# Altium PCB PCA_0006_Mini_CB_REV_B.PcbDoc
Units mm, origin at the board's own origin, x right, y up, seen from the top; angles counter-clockwise.
Board outline 38.5 x 38.5 mm, 2 copper layers (Top, Bottom), stack 1.57 mm thick; 27 components, 89 nets, 219 pads, 98 vias.
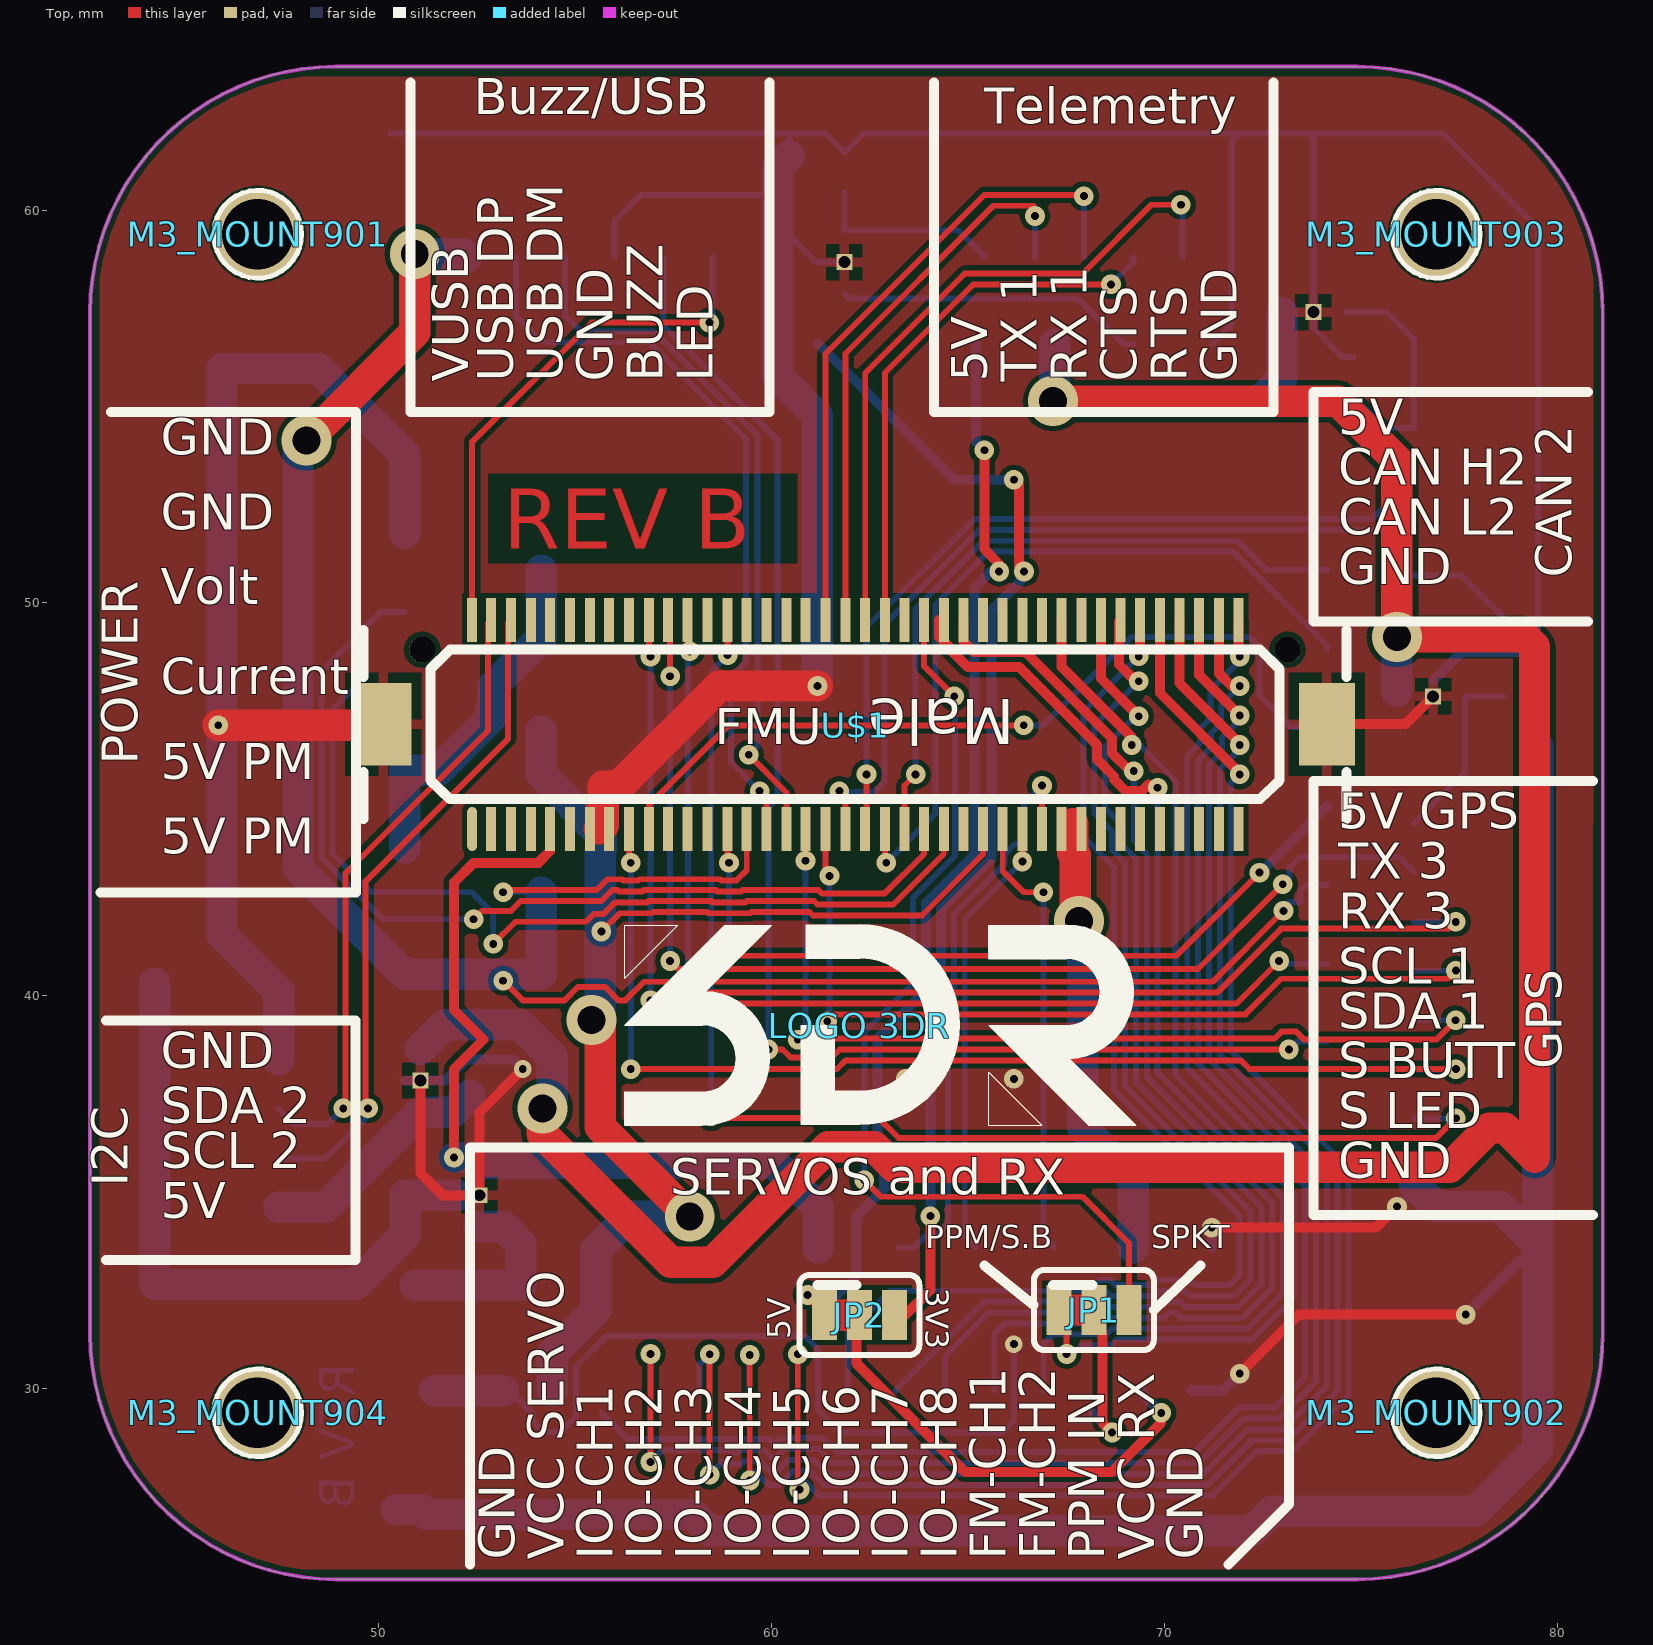
[diagram p0: Top view]
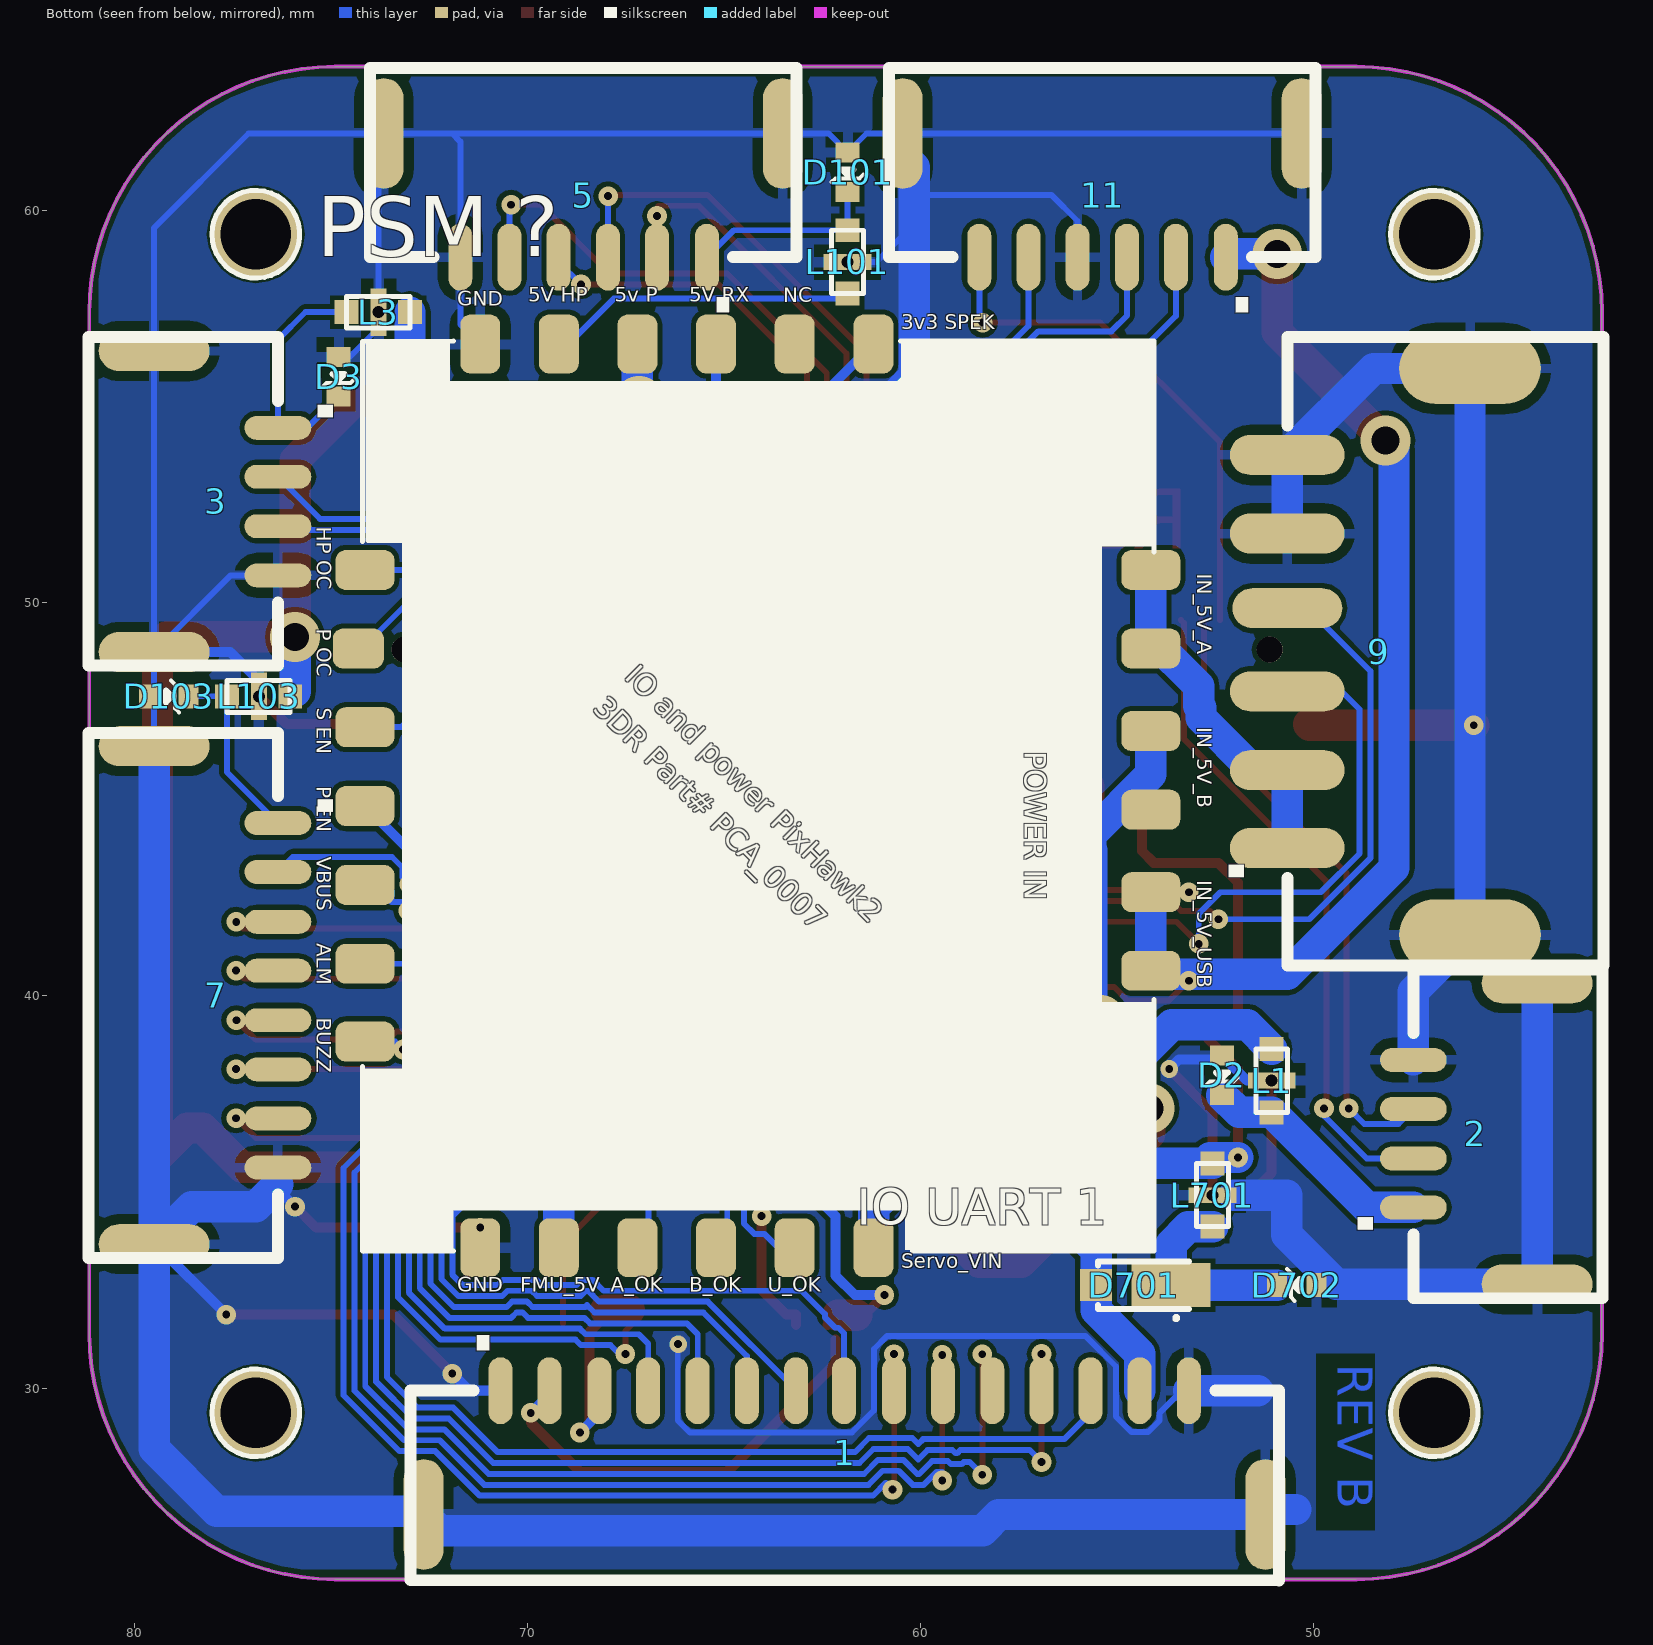
[diagram p1: Bottom view, seen from below]
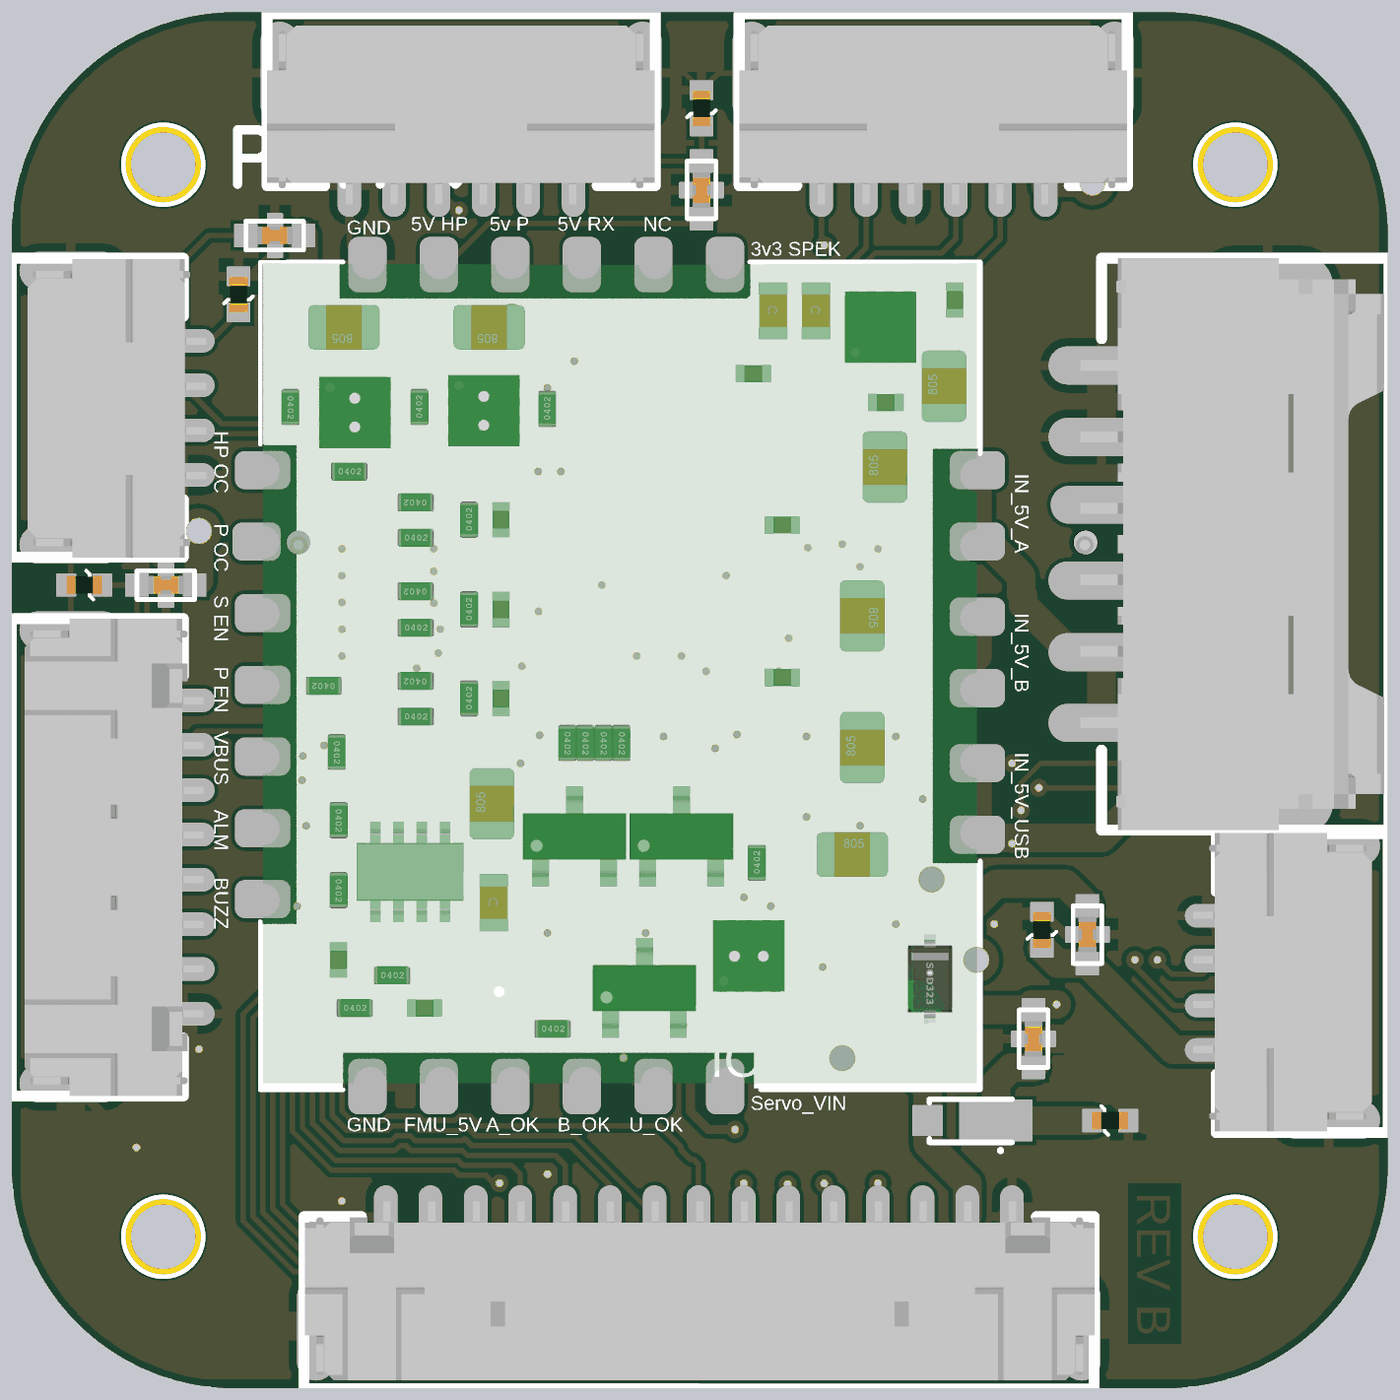
[diagram p2: 3D render of the assembled board from below, using the file's embedded part models]

## Layer stack, top to bottom
Top Solder: solder mask 0.0102, Solder Resist, Dk 3.5
Top: signal copper 0.035
Dielectric 1: core 1.5, FR-4, Dk 4.8
Bottom: signal copper 0.035
Bottom Solder: solder mask 0.0102, Solder Resist, Dk 3.5

## Board outline
42.65,31.4 ccw(c48.9,31.4) 48.9,25.15 74.9,25.15 ccw(c74.9,31.4) 81.15,31.4 81.15,57.4 ccw(c74.9,57.4) 74.9,63.65 48.9,63.65 ccw(c48.9,57.4) 42.65,57.4

## Design rules (kind name [scope] priority, off if disabled: settings)
Clearance jumpers [(InNet('RX_5V0_OUT') OR InNet('PPM-SBUS-PROT')) vs (InNet('Net1_2') OR InNet('Net1_3'))] p1: gap=0
Clearance mdViaVia [IsVia vs IsVia] p2: gap=0.127
Clearance mdPadVia [IsPad vs IsVia] p3: gap=0.127
Clearance mdPadPad [IsPad vs IsPad] p4: gap=0.127
Clearance mdWireVia [(InLayerClass('Signal Layers') AND IsTrack) vs IsVia] p5: gap=0.127
Clearance mdWirePad [(InLayerClass('Signal Layers') AND IsTrack) vs IsPad] p6: gap=0.127
Clearance mdWireWire [(InLayerClass('Signal Layers') AND IsTrack) vs (InLayerClass('Signal Layers') AND IsTrack)] p7: gap=0.127
Clearance [All] p8: gap=0.127
ComponentClearance [All] p1: gap=0.076 collisioncheckmode=3 verticalgap=0 showdistances=FALSE
HoleSize [All] p1: absolutevalues=TRUE maxlimit=2540 minlimit=0.2 maxpercent=80.000 minpercent=20.000
HoleToHoleClearance [All] p1: gap=0.203 allowstackedmicrovias=TRUE
MinimumSolderMaskSliver [All] p1 off: minsoldermaskwidth=0.254
PasteMaskExpansion [All] p1: expansion=0.025
PolygonConnect ThermalVias [IsVia] p1: connectstyle=Direct reliefconductorwidth=0.254 reliefentries=4 polygonreliefangle="90 Angle" airgapwidth=0.254
PolygonConnect [All] p2: connectstyle=Relief reliefconductorwidth=0.254 reliefentries=4 polygonreliefangle="90 Angle" airgapwidth=0.254
RoutingVias [All] p1: holewidth=0.2 width=0.5 viastyle="Through Hole" minholewidth=0.2 minwidth=0.5 maxholewidth=0.711 maxwidth=1.27
ShortCircuit JP [(InNet('RX_5V0_OUT') OR InNet('PPM-SBUS-PROT')) vs (InNet('Net1_2') OR InNet('Net1_3'))] p1: allowed=TRUE
ShortCircuit [All] p2: allowed=FALSE
SilkToBoardRegionClearance [All] p1 off:
SilkToSilkClearance [All] p1 off: silktosilkclearance=0.254
SilkToSolderMaskClearance [IsPad] p1 off: minsilkscreentomaskgap=0.254 clearancetoexposedcopper=TRUE
SolderMaskExpansion [All] p1: expansion=0.025
UnpouredPolygon [All] p1: allowunpoured=FALSE
Width [All] p1: maxlimit=0.8 minlimit=0.15 preferedwidth=0.254
20 further rules are at their usual default settings.

## Classes and differential pairs
component class PCA_0006_Mini_CB_Plugs_REV_A: 2 3 5 7 D2 D3 D101 D103 L1 L3 L101 L103
component class PCA_0006_Mini_CB_Power_REV_A: 9 11 "PSM ?"
component class PCA_0006_Mini_CB_Servo_REV_A: 1 D701 D702 JP1 JP2 L701
component class PCA_0006_Mini_CB_Mech_REV_A: "LOGO 3DR" M3_MOUNT901 M3_MOUNT902 M3_MOUNT903 M3_MOUNT904
component class PCA_0006_Mini_CB_80Pin_REV_A: FIDUCIALS1 U$1

## Components (designator, comment, footprint, x,y, rotation, side; value= is the part's Value field where it differs from the comment)
1 "CLICKMATE_1.25_15" CLICKMATE_H15 61.914,24.5 r0 bottom
2 "CLICKMATE_1.25_4" CLICKMATE_H4 42,36.495 r270 bottom
3 "CLICKMATE_1.25_4" CLICKMATE_H4 81.8,52.578 r90 bottom
5 "CLICKMATE_1.25_6" CLICKMATE_H6 68.58,64.25 r180 bottom
7 "CLICKMATE_1.25_8" CLICKMATE_H8 81.8,40.005 r90 bottom
9 "CLICKMATE_2_6" CLICKMATE_H6_2MM 43.757,48.768 r270 bottom
11 "CLICKMATE_1.25_6" CLICKMATE_H6 55.372,64.25 r180 bottom
D2 "DIODE-TVS" 0402-TVS 52.324,37.973 r90 bottom
D3 "DIODE-TVS" 0402-TVS 74.803,55.753 r90 bottom
D101 "DIODE-TVS" 0402-TVS 61.849,60.96 r90 bottom
D103 "DIODE-TVS" 0402-TVS 79.121,47.625 r0 bottom
D701 "Schottky barrier diode in DO214AC, e.g. Fairchild SS14." MICROSMP 54.864,32.639 r0 bottom
D702 "DIODE-TVS" 0402-TVS 50.419,32.639 r180 bottom
JP1 "JUMPER-31-2" SJ_3_PASTE1&2 68.199,32.004 r0 top
JP2 "JUMPER-31-2" SJ_3_PASTE1&2 62.23,31.877 r0 top
L1 "Kyocera KNH16C104DA5TS EMI filter" KYOCERA-KNH16-DA 51.054,37.846 r270 bottom
L3 "Kyocera KNH16C104DA5TS EMI filter" KYOCERA-KNH16-DA 73.787,57.404 r0 bottom
L101 "Kyocera KNH16C104DA5TS EMI filter" KYOCERA-KNH16-DA 61.849,58.674 r90 bottom
L103 "Kyocera KNH16C104DA5TS EMI filter" KYOCERA-KNH16-DA 76.835,47.625 r0 bottom
L701 "Kyocera KNH16C104DA5TS EMI filter" KYOCERA-KNH16-DA 52.559,34.925 r90 bottom
"LOGO 3DR" "DO NOT FIT" 3DR_SMALL 62.23,39.243 r0 top
M3_MOUNT901 "MOUNT-HOLE1.8MM" MOUNT-HOLE1.8 46.914,59.385 r0 top
M3_MOUNT902 "MOUNT-HOLE1.8MM" MOUNT-HOLE1.8 76.911,29.388 r0 top
M3_MOUNT903 "MOUNT-HOLE1.8MM" MOUNT-HOLE1.8 76.911,59.385 r0 top
M3_MOUNT904 "MOUNT-HOLE1.8MM" MOUNT-HOLE1.8 46.914,29.388 r0 top
"PSM ?" "Power Selection module" PSM 63.881,45.339 r270 bottom
U$1 "CON-DF17-80M" CON-DF17-80M 62.128,46.914 r180 top locked

## Footprints (in the part's own frame and the unit in brackets; to place one, negate y for a bottom-side part, rotate by r counter-clockwise, add the part's x,y. Pads: shape width x height; smd on the part's side, far side on the other; paste and mask are expansions set on the pad)
3DR_SMALL [mm]
  silkscreen extent -5.97,-2.53 7.04,2.57
0402-TVS [mil] "0402-TVS"
  rect 20x24 smd: A(20,0) C(-19.68,0)
  silkscreen extent -10,-16 3,16, body extent -20,-10 20,10, height 20
CLICKMATE_H4 [mil] "5023860470"
  rrect100% 24x67 smd: 1(74,-214.57) 2(25,-214.57) 3(-24.61,-214.57) 4(-73.82,-214.57)
  rrect100% 40x111 smd: GND(-150.59,-90.55) GND(151,-90.55)
  silkscreen extent -164,-215 165,-25, body extent -165,-240 164,-43, height 217
CLICKMATE_H6 [mil]
  rrect100% 24x67 smd: 1(124,-214.57) 2(74,-214.57) 3(25,-214.57) 4(-24.61,-214.57) 5(-73.82,-214.57) 6(-123.03,-214.57)
  rrect100% 40x111 smd: GND(-199.8,-90.55) GND(200,-90.55)
  silkscreen extent -214,-215 214,-25, body extent -214,-235 214,-38, height 217
CLICKMATE_H6_2MM [mil]
  rrect100% 40x115 smd: 1(197,-271.65) 2(119,-271.65) 3(40,-271.65) 5(-118.11,-271.65) 6(-196.85,-271.65)
  rrect100% 40x110.24 smd: 4(-43.31,-271.65)
  rrect100% 71x142 smd: GND(-283.46,-88.58) GND(284,-88.58)
  silkscreen extent -315,-272 315,45, body extent -315,-295 315,40, height 270
CLICKMATE_H8 [mil]
  rrect100% 24x67 smd: 1(173,-214.57) 2(124,-214.57) 3(74,-214.57) 4(25,-214.57) 5(-24.61,-214.57) 6(-73.82,-214.57) 7(-123.03,-214.57) 8(-172.24,-214.57)
  rrect100% 40x111 smd: GND(-249.02,-90.55) GND(250,-90.55)
  silkscreen extent -263,-215 263,-25, body extent -263,-237 263,-40, height 217
CLICKMATE_H15 [mil]
  rrect100% 24x67 smd: 1(345.24,-214.57) 2(296.24,-214.57) 3(246.24,-214.57) 4(197.24,-214.57) 5(147.64,-214.57) 6(98.42,-214.57) 7(49.21,-214.57) 8(0.97,-214.57) 9(-49.03,-214.57) 10(-98.03,-214.57) 11(-147.64,-214.57) 12(-196.85,-214.57) 13(-246.06,-214.57) 14(-295.27,-214.57) 15(-344.49,-214.57)
  rrect100% 40x111 smd: GND(-421.26,-90.55) GND(422.24,-90.55)
  silkscreen extent -435,-215 435,-25, body extent -436,-231 434,-35, height 217
CON-DF17-80M [mil]
  rrect100% 10x44 smd: 1(384,105)
  rect 10x44 smd: 2(384,-104.33) 3(365,105) 4(365,-104.33) 5(345,105) 6(345,-104.33) 7(325,105) 8(325,-104.33) 9(306,105) 10(306,-104.33) 11(286,105) 12(286,-104.33) 13(266,105) 14(266,-104.33) 15(247,105) 16(247,-104.33) 17(227,105) 18(227,-104.33) 19(207,105) 20(207,-104.33) 21(188,105) 22(188,-104.33) 23(168,105) 24(168,-104.33) 25(148,105) 26(148,-104.33) 27(128,105) 28(128,-104.33) 29(109,105) 30(109,-104.33) 31(89,105) 32(89,-104.33) 33(69,105) 34(69,-104.33) 35(50,105) 36(50,-104.33) 37(30,105) 38(30,-104.33) 39(10,105) 40(10,-104.33) 41(-9.84,105) 42(-9.84,-104.33) 43(-29.53,105) 44(-29.53,-104.33) 45(-49.21,105) 46(-49.21,-104.33) 47(-68.9,105) 48(-68.9,-104.33) 49(-88.58,105) 50(-88.58,-104.33) 51(-108.27,105) 52(-108.27,-104.33) 53(-127.95,105) 54(-127.95,-104.33) 55(-147.64,105) 56(-147.64,-104.33) 57(-167.32,105) 58(-167.32,-104.33) 59(-187.01,105) 60(-187.01,-104.33) 61(-206.69,105) 62(-206.69,-104.33) 63(-226.38,105) 64(-226.38,-104.33) 65(-246.06,105) 66(-246.06,-104.33) 67(-265.75,105) 68(-265.75,-104.33) 69(-285.43,105) 70(-285.43,-104.33) 71(-305.12,105) 72(-305.12,-104.33) 73(-324.8,105) 74(-324.8,-104.33) 75(-344.49,105) 76(-344.49,-104.33) 77(-364.17,105) 78(-364.17,-104.33) 79(-383.86,105) 80(-383.86,-104.33)
  rect 56x83 smd: GND(-472.44,0) GND(473,0)
  round 26 hole 26 unplated: hole-1(-433.07,-74.8) hole-2(434,-74.8)
  silkscreen extent -492,-94 493,95, body extent -492,-109 492,115, height 124
KYOCERA-KNH16-DA [mil] "KYOCERA-KNH16-DA"
  rect 16x16 smd: GND(0,-15.75) GND(0,16)
  rect 16x16 hole 12: GND(0,0)
  rect 24x24 smd: P$1(-31.5,0) P$2(32,0)
  silkscreen extent -31,-16 32,16, body extent -20,-10 20,10, height 14
MICROSMP [mil]
  rect 32x32 smd: ANODE(26,0)
  rect 79x44 smd: CATHODE(-49.21,0)
  silkscreen extent -67,-24 24,35
MOUNT-HOLE1.8 [mil]
  round 87 hole 71: 1(0,0)
  silkscreen extent -44,-44 44,44
PSM [mm]
  rrect50% 1.5x1.016 smd: 5V_HIPOWER(-11.25,-5.318) 5V_PERIPH(-11.25,-3.317) !VBUS_VALID(11.75,0.686) !VDD_BACKUP_VALID(11.75,-1.318) !VDD_BRICK_VALID(11.75,-3.317) GND(-11.25,-7.318) GND(11.75,-7.318) NC(-11.25,0.686) RX(-11.25,-1.318) SERVO_IN(11.75,2.692) SPEK(-11.25,2.692) VDD_5V_IN_PROT(11.75,-5.318)
  rrect50% 1.016x1.5 smd: !VDD_5V_HIPOWER_OC(-5.5,-10.25) !VDD_5V_PERIPH_EN(0.508,-10.25) ALARM(4.521,-10.25) BUZZER_OUT(6.502,-10.25) VBUS(2.515,-10.25) VDD_3V3_SPEKTRUM_EN(-1.5,-10.25) VDD_5V_BACKUP(-1.4,9.75) VDD_5V_BACKUP(0.6,9.75) VDD_BRICK_IN(-5.5,9.75) VDD_BRICK_IN(-3.5,9.75) VDD_VBUS(2.7,9.75) VDD_VBUS(4.7,9.75)
  rrect50% 1.016x1.3 smd: !VDD_5V_PERIPH_OC(-3.5,-10.419)
  silkscreen extent -11.33,-10.32 11.9,9.83, body extent -11.3,-10.24 11.66,9.73, height 2.11
SJ_3_PASTE1&2 [mil]
  rect 25x50 smd paste-39.37: 1(-35,0) 2(0,0) 3(35,0)
  silkscreen extent -60,-40 60,40

## Part data
1: "Connector, Receptacle, 15Pos, 1.25MM, R/A, SMD, Tin"
2 3: "Connector, Receptacle, 4Pos, 1.25MM, R/A, SMD, Tin"
5 11: "1.25 W/B SGL R/A REC ASSY 6CKT"
7: "Connector, Receptacle, 8Pos, 1.25MM, R/A, SMD, Tin"
9: "Connector, Receptacle, 6Pos, 2.00MM, R/A, PCB, Tin"
D2 D3 D101 D103 D702: "Diode, TVS, 14VWM, 40VC, 0402, SMD"
D701: library part DIODE-SCHOTTKY_MSMP, "Diode, Schottky, 40V, 1A, MicroSMP, SMD"
JP1 JP2 M3_MOUNT901 M3_MOUNT902 M3_MOUNT903 M3_MOUNT904: "DO NOT FIT"
L1 L3 L101 L103 L701: library part KNH16C104DA5TS, "Capacitor, Filter, 0.1uF, 25V, 2A, 0603, SMD"
"LOGO 3DR": library part "3DR Logo"
"PSM ?": library part PSMPSM, "PCA, PSM, PX4, Assembly"
U$1: "Connector, Header, 80Pos, .5MM, DUAL, SMD, Au"

## Via types
v1: diameter 0.5, hole 0.2, Top to Bottom, tented both sides, 88 vias
v2: diameter 1.27, hole 0.711, Top to Bottom, tented both sides, 8 vias
v3: diameter 0.45, hole 0.2, Top to Bottom, tented both sides, 2 vias

## Nets (pads, with @x,y where several pads share a name; then routed paths per layer and width w, separated by ;. In a path a pad name is that pad's centre, name@x,y a point inside that pad or via, vN(x,y) a via of type N, cw(c..) or ccw(c..) an arc to the next point about the centre after c; other vN are vias at no path point)
ALARM: "PSM ?.ALARM" U$1.24 | length 26.8
  Top w0.15: U$1.24 57.861,48.819 v1(57.912,48.768) ; v1(57.912,39.624) 58.094,39.806 71.832,39.806 v1(72.913,40.886)
  Bottom w0.15: v1(57.912,39.624) 57.864,39.672 57.864,48.552 57.78,48.636 v1(57.912,48.768) ; v1(72.913,40.886) 72.981,40.818 74.131,40.818
AUX_BATT_CURRENT_SENS: U$1.25
AUX_BATT_VOLTAGE_SENS: U$1.23
BATT_CURRENT_SENS_PROT: 9.3 U$1.49 | length 24.3
  Top w0.15: v1(52.913,41.323) 53.476,41.886 55.273,41.886 55.475,42.089 55.723,42.089 56.015,42.38 56.829,42.38 56.862,42.413 58.463,42.413 58.496,42.38 59.329,42.38 59.362,42.413 61.077,42.413 61.166,42.324 63.089,42.324 64.378,43.613 U$1.49
  Bottom w0.15: 9.3 49.278,47.752 48.821,47.295 48.821,43.62 49.804,42.637 52.365,42.637 52.913,42.089 v1(52.913,41.323)
BATT_VOLTAGE_SENS_PROT: 9.4 U$1.47 | length 24.9
  Top w0.15: v1(52.413,41.95) 52.626,42.163 53.361,42.163 53.611,42.413 55.656,42.413 55.933,42.69 56.078,42.69 56.111,42.657 56.714,42.657 56.747,42.69 58.578,42.69 58.611,42.657 59.214,42.657 59.247,42.69 61.191,42.69 61.281,42.601 62.866,42.601 63.878,43.613 U$1.47
  Bottom w0.15: 9.4@50.657,49.768 50.044,49.768 48.544,48.268 48.544,43.505 50.099,41.95 v1(52.413,41.95)
BUZZER_OUT: 11.5 "PSM ?.BUZZER_OUT" | length 36
  Top w0.15: v1(59.912,38.636) 60.273,38.636 60.475,38.435 61.524,38.435 61.726,38.636 v1(73.163,38.636)
  Bottom w0.15: 11.5 57.247,57.052 60.142,54.157 60.142,45.025 59.912,44.795 v1(59.912,38.636) ; v1(73.163,38.636) 73.221,38.636 73.363,38.778 73.363,38.837 74.131,38.837
CAN_H_1: U$1.79
CAN_H_2: 3.2 U$1.41 | length 20.7
  Top w0.15: U$1.41 62.412,44.281 v1(62.412,45.637)
  Bottom w0.15: v1(62.412,45.637) 62.412,49.387 65.162,52.136 75.273,52.136 75.297,52.16 75.297,52.163 76.347,53.213 3.2
CAN_L_1: U$1.77
CAN_L_2: 3.3 U$1.39 | length 21.6
  Top w0.15: v1(61.722,45.212) v1@61.874,45.06 ; v1@61.874,45.06 U$1.39 v1@61.874,45.06
  Bottom w0.15: v1(61.722,45.212) 61.75,45.184 62.6,45.184 62.864,45.449 62.864,49.447 65.277,51.86 76.256,51.86 3.3
E\X\T\E\R\N\_\C\S\: U$1.5
EXTERN_DRDY: U$1.11
F\M\U\-\L\E\D\_\A\M\B\E\R\: 11.6 U$1.2 | length 13.5
  Top w0.152: U$1.2 52.375,54.099 55.412,57.136 v1(58.412,57.136)
  Bottom w0.152: v1(58.412,57.136) 58.497,57.221 11.6
FMU-!RESET: U$1.7
FMU-CH1-PROT: 1.4 U$1.50 | length 30.2
  Top w0.254: U$1.50 64.259,49.564 64.259,49.138 64.497,48.9 64.497,48.861 64.988,48.37 66.299,48.37 68.278,46.391 68.278,46.02 68.711,45.586 68.711,45.511 69.006,45.216 69.424,45.216 69.583,45.375 69.742,45.216 v1(69.822,45.296)
  Bottom w0.15: 1.4 66.924,31.148 67.162,31.387 68.521,31.387 68.663,31.529 72.1,31.529 73.017,32.445 73.017,34.849 69.822,38.044 v1(69.822,45.296)
FMU-CH2-PROT: 1.5 U$1.52 | length 30.2
  Top w0.254: U$1.52 64.878,49.019 65.146,48.751 66.456,48.751 68.659,46.549 68.659,46.178 69.116,45.72 v1(69.215,45.72)
  Bottom w0.15: 1.5 65.664,31.388 65.939,31.664 68.406,31.664 68.549,31.806 69.986,31.806 70.12,31.941 70.277,31.941 70.411,31.806 71.986,31.806 72.74,32.56 72.74,34.735 69.545,37.93 69.545,43.613 69.215,43.942 v1(69.215,45.72)
FMU-CH3-PROT: U$1.54
FMU-CH4-PROT: U$1.56
FMU-CH5-PROT: U$1.58
FMU-CH6-PROT: U$1.60
FMU-SWCLK: U$1.3
FMU-SWDIO: U$1.1
GND: 1.1 1.15 1.GND 2.4 2.GND 3.4 3.GND 5.6 5.GND 7.8 7.GND 9.5 9.6 9.GND 11.4 11.GND "PSM ?.GND" D2.A D3.A D101.A D103.A D702.A L1.GND L3.GND L101.GND L103.GND L701.GND U$1.13 U$1.15 U$1.GND | length 243.5
  Top w0.254: L1.GND@51.054,37.846 51.054,35.495 51.624,34.925 52.559,34.925 52.559,37.033 v3(53.663,38.136) ; v1(71.199,34.101) 75.377,34.101 v1(75.912,34.636) ; v1(71.913,30.387) 73.412,31.886 v1(77.662,31.886) ; U$1.GND@74.128,46.914 76.124,46.914 L103.GND@76.835,47.625
  Top w0.8: v1(45.912,46.887) 50.087,46.887 U$1.GND@50.114,46.914 ; 55.613,44.247 55.709,44.342 55.709,45.333 56.109,45.333 58.662,47.887 v1(61.162,47.887)
  Bottom w0.15: 11.GND@50.292,61.95 11.GND@60.447,61.95 ; 1.15@53.344,29.95 53.907,29.386 53.907,29.194 54.204,28.897 54.624,28.897 55.016,29.289 55.016,30.565 55.79,31.338 60.85,31.338 61.175,31.013 61.175,29.45 61.739,28.887 65.863,28.887 66.171,29.194 66.171,31.128 v3(66.162,31.137) ; 11.4 55.997,59.721 56.663,60.387 60.154,60.387 60.447,60.387 60.447,59.352 61.125,58.674 61.449,58.674 L101.GND@61.849,58.674 ; 11.GND@60.447,61.386 11.GND@60.447,61.95 ; 71.199,56.589 71.705,57.095 5.6 71.705,61.743 71.913,61.95 ; D3.A 74.524,56.261 73.787,56.998 73.787,57.404 73.787,57.804 73.787,61.818 5.GND@73.655,61.95 ; 3.4 77.55,50.703 3.GND@79.5,48.753 ; 7.GND@79.5,46.355 3.GND@79.5,48.753 ; 11.GND@60.447,61.95 61.367,61.95 D101.A 62.331,61.95 63.5,61.95 71.913,61.95 ; 71.913,61.95 5.GND@73.655,61.95 ; 5.GND@73.655,61.95 77.099,61.95 79.5,59.549 79.5,56.413 3.GND@79.5,48.753
  Bottom w0.254: L1.GND@50.648,37.846 51.054,37.846 51.454,37.846 51.689,37.846 52.229,38.386 53.413,38.386 v3(53.663,38.136) ; 1.1 71.476,29.95 v1(71.913,30.387) ; 71.199,33.589 v1(71.199,34.101) ; v1(75.912,34.636) 76.35,35.074 76.35,35.199 ; L103.GND@76.835,48.025 77.563,48.753 3.GND@79.5,48.753 ; v1(77.662,31.886) 79.456,33.68 7.GND@79.5,33.68
  Bottom w0.8: 2.GND@44.3,40.32 44.3,32.66 49.412,32.66 50.673,33.92 50.673,34.925 52.004,34.925 L701.GND@52.011,34.931 ; 2.4 47.45,40.111 46.007,41.554 46.007,55.968 48.457,55.968 9.6 9.5 ; 50.445,26.927 51.087,26.927 51.214,26.8 57.999,26.8 58.412,26.387 72.225,26.387 72.639,26.8 72.725,26.886 77.913,26.886 79.5,28.474 7.GND@79.5,33.68 ; 51.413,29.95 1.15 ; 11.GND@60.447,61.386 60.154,61.093 60.154,60.387 60.154,55.769 61.162,54.761 v1(61.162,47.887) ; 76.35,35.199 76.913,34.636 78.544,34.636 7.GND@79.5,33.68 ; 7.GND@79.5,46.355 7.GND@79.5,33.68
  other v1: 63.412,37.887 66.162,37.887
GPS_POWER: "PSM ?.5V_PERIPH" L1.P$1 L3.P$1 L103.P$1 | length 76
  Top w0.8: v2(54.163,37.136) 54.163,36.493 57.431,33.224 58.5,33.224 61.433,36.157 62.604,36.157 63.125,35.636 77.261,35.636 78.261,36.637 78.663,36.637 79.413,35.887 79.413,48.887 79.163,49.137 v2(75.912,49.137) 75.912,53.636 74.413,55.136 v2(67.162,55.136)
  Bottom w0.15: L103.P$1 L103.P$1@76.035,47.747
  Bottom w0.8: L1.P$1 51.67,39.262 53.6,39.262 54.415,38.448 54.415,37.389 v2(54.163,37.136) ; 67.198,56.589 67.198,55.172 v2(67.162,55.136) 72.412,55.136 72.987,55.711 L3.P$1 ; L103.P$1@75.912,47.747 v2(75.912,49.137)
I2C_1_SCL: 7.4 U$1.37 | length 22.7
  Top w0.15: U$1.37 61.366,43.155 v1(61.468,43.053) ; v1(61.413,39.354) 61.587,39.529 72.055,39.529 72.96,40.434 77.203,40.434 v1(77.412,40.644)
  Bottom w0.15: v1(61.413,39.354) 61.468,39.409 v1(61.468,43.053) 61.468,43.081 v1@61.413,43.026 ; 7.4 77.409,40.64 v1(77.412,40.644)
I2C_1_SDA: 7.5 U$1.35 | length 23.6
  Top w0.15: v1(60.662,38.887) 61.585,38.887 61.612,38.913 72.8,38.913 72.975,39.088 73.35,39.088 73.552,38.887 76.913,38.887 v1(77.406,39.38) ; v1(60.858,43.441) U$1.35
  Bottom w0.15: v1(60.662,38.887) 60.858,39.082 v1(60.858,43.441) ; 7.5 v1(77.406,39.38)
I2C_2_SCL: 2.2 U$1.6 | length 16.9
  Top w0.15: v1(49.722,37.137) 49.663,37.196 49.663,42.918 53.29,46.546 53.29,49.489 U$1.6
  Bottom w0.15: 2.2 48.636,35.86 49.722,36.946 v1(49.722,37.137)
I2C_2_SDA: 2.3 U$1.4 | length 16
  Top w0.15: v1(49.095,37.137) 49.155,37.196 49.155,43.129 52.782,46.756 52.782,49.489 U$1.4
  Bottom w0.15: 2.3 47.83,36.74 48.699,36.74 v1(49.095,37.137)
I\O\-\L\E\D\_\S\A\F\E\T\_\P\R\O\T\: 7.7 U$1.28 | length 33.3
  Top w0.15: v1(58.461,36.935) 58.509,36.886 62.727,36.886 63.227,36.387 76.913,36.387 v1(77.412,36.886) ; v1(58.877,48.672) U$1.28
  Bottom w0.15: v1(58.461,36.935) 58.461,48.255 v1(58.877,48.672) ; 7.7 77.406,36.88 v1(77.412,36.886)
IO-!RESET: U$1.75
IO-CH1-PROT: 1.13 U$1.80 | length 40.3
  Top w0.254: U$1.80 71.878,48.671 v1(71.913,48.636)
  Bottom w0.15: 1.13@55.662,29.386 56.332,28.717 59.927,28.717 60.052,28.592 60.204,28.744 61.305,28.744 61.663,28.386 70.753,28.386 71.886,29.52 72.796,29.52 73.571,30.295 73.571,35.162 70.574,38.158 70.574,46.113 70.907,46.445 70.907,46.803 71.162,47.059 71.162,47.776 71.913,48.526 v1(71.913,48.636)
IO-CH2-PROT: 1.12 U$1.78 | length 43.4
  Top w0.15: v1(56.912,28.136) v1(56.912,30.886)
  Top w0.254: U$1.78 71.378,48.209 71.701,47.887 v1(71.913,47.887)
  Bottom w0.15: v1(56.912,28.136) 57.216,28.44 58.981,28.44 59.062,28.36 59.105,28.36 59.186,28.44 59.812,28.44 60.052,28.201 60.319,28.467 61.19,28.467 61.548,28.109 70.867,28.109 72.001,29.243 72.91,29.243 73.848,30.18 73.848,35.276 70.851,38.272 70.851,45.998 71.183,46.33 71.183,46.688 71.439,46.944 71.439,47.413 v1(71.913,47.887) ; v1(56.912,30.886) 56.914,30.885 1.12
IO-CH3-PROT: 1.11 U$1.76 | length 42.9
  Top w0.15: v1(58.42,27.813) v1(58.42,30.879)
  Top w0.254: U$1.76 70.878,48.171 v1(71.913,47.136)
  Bottom w0.15: 1.11 58.164,30.623 v1(58.42,30.879) ; v1@58.417,27.816 v1(58.42,27.813) 58.743,28.136 58.893,28.136 58.947,28.083 59.219,28.083 59.3,28.163 59.697,28.163 60.028,27.832 60.076,27.832 60.434,28.19 61.075,28.19 61.433,27.832 70.982,27.832 72.115,28.966 73.025,28.966 74.124,30.065 74.124,35.391 71.128,38.387 71.128,45.883 71.46,46.215 71.46,46.574 71.913,47.026 v1(71.913,47.136)
IO-CH4-PROT: 1.10 U$1.74 | length 42.4
  Top w0.15: v1(59.44,27.664) v1(59.44,30.859)
  Top w0.254: U$1.74 70.378,47.958 71.913,46.424 v1(71.913,46.387)
  Bottom w0.15: 1.10 59.424,30.844 v1(59.44,30.859) ; v1(59.44,27.664) 59.44,27.886 59.582,27.886 59.913,27.555 60.19,27.555 60.548,27.914 60.96,27.914 61.318,27.555 71.097,27.555 72.23,28.689 73.14,28.689 74.401,29.95 74.401,35.506 71.405,38.502 71.405,45.769 71.913,46.276 v1(71.913,46.387)
IO-CH5-PROT: 1.9 U$1.72 | length 41.5
  Top w0.15: v1(60.669,30.88) 60.662,30.874 60.662,27.476 v1(60.706,27.432)
  Top w0.254: U$1.72 69.878,47.708 71.913,45.674 v1(71.913,45.637)
  Bottom w0.15: 1.9 v1(60.669,30.88) ; v1(60.706,27.432) 60.878,27.604 61.204,27.279 71.212,27.279 72.345,28.412 73.255,28.412 74.678,29.836 74.678,35.621 71.682,38.617 71.682,45.406 v1(71.913,45.637)
IO-CH6-PROT: 1.8 U$1.70 | length 31.2
  Top w0.254: v1(69.342,48.641) 69.378,48.677 U$1.70
  Bottom w0.15: 1.8 61.939,31.413 62.078,31.552 62.163,31.552 62.428,31.817 62.428,31.902 63.021,32.494 68.062,32.494 68.339,32.771 68.621,32.771 68.756,32.637 69.641,32.637 69.776,32.771 70.621,32.771 70.756,32.637 71.641,32.637 71.909,32.904 71.909,34.39 68.714,37.585 68.714,43.268 67.932,44.05 67.932,47.235 69.338,48.641 v1(69.342,48.641)
  Bottom w0.254: v1(69.342,48.641) v1@69.347,48.636
IO-CH7-PROT: 1.7 U$1.68 | length 29.6
  Top w0.254: U$1.68 68.838,49.523 68.838,48.432 69.264,48.006 v1(69.342,48.006)
  Bottom w0.15: 1.7 63.164,29.976 65.406,32.217 68.177,32.217 68.454,32.494 68.506,32.494 68.641,32.36 69.756,32.36 69.891,32.494 70.506,32.494 70.641,32.36 71.756,32.36 72.186,32.789 72.186,34.505 68.991,37.7 68.991,43.383 68.661,43.713 68.661,44.189 68.209,44.641 68.209,46.873 v1(69.342,48.006)
IO-CH8-PROT: 1.6 U$1.66 | length 29.2
  Top w0.254: U$1.66 68.378,48.081 v1(69.342,47.117)
  Bottom w0.15: 1.6 64.414,30.834 65.52,31.941 68.291,31.941 68.48,32.129 68.526,32.083 69.871,32.083 70.005,32.217 70.392,32.217 70.526,32.083 71.871,32.083 72.463,32.675 72.463,34.62 69.268,37.815 69.268,43.498 68.938,43.828 68.938,44.324 68.486,44.776 68.486,46.349 69.254,47.117 v1(69.342,47.117)
IO-SWCLK: U$1.71
IO-SWDIO: U$1.69
IO-USART1_RX_SPECTRUM_DSM: JP1.3 U$1.48 | length 25.1
  Top w0.15: v1@62.276,35.387 v1(62.357,35.306) 62.776,34.887 67.913,34.887 69.088,33.711 JP1.3@69.088,31.664 ; U$1.48 63.878,48.39 v1(64.643,47.625)
  Bottom w0.15: v1(62.357,35.306) 62.357,39.081 63.596,40.321 63.596,42.5 64.662,43.566 64.662,47.606 v1(64.643,47.625)
IO-USART1_TX: U$1.46
Net1_2: 1.2 JP2.2 | length 11
  Top w0.254: JP2.2@62.162,31.258 62.162,30.636 64.912,27.886 68.662,27.886 69.912,29.137 v1(69.912,29.386)
  Bottom w0.254: 1.2 69.439,29.86 v1(69.912,29.386)
Net1_3: 1.3 JP1.2 | length 3.7
  Top w0.254: JP1.2@68.199,31.664 68.412,31.45 68.412,29.137 v1(68.662,28.887)
  Bottom w0.254: 1.3@68.169,29.38 v1(68.662,28.887)
Net2_1: 2.1 D2.C L1.P$2 | length 6.1
  Bottom w0.8: 2.1 48.636,34.615 L1.P$2 51.884,37.033 D2.C
Net3_1: 3.1 D3.C L3.P$2 | length 6.2
  Bottom w0.15: L3.P$2 75.645,57.404 76.35,56.699 3.1 75.598,54.458 D3.C
Net5_1: 5.1 D101.C L101.P$2 | length 4.8
  Bottom w0.15: D101.C L101.P$2 64.744,59.487 5.1
Net7_1: 7.1 D103.C L103.P$2 | length 4.7
  Bottom w0.15: 7.1 77.648,45.697 L103.P$2 D103.C
NetD701_CATHODE: D701.CATHODE D702.C L701.P$1 | length 5
  Bottom w0.8: D702.C D701.CATHODE 53.614,33.685 53.174,34.125 L701.P$1
OTG_DM1: 11.3 U$1.33 | length 18.2
  Top w0.15: v1(59.412,46.136) 60.376,45.173 U$1.33
  Bottom w0.15: 11.3 54.737,57.312 55.135,56.914 56.994,56.914 59.635,54.272 59.635,46.359 v1(59.412,46.136)
OTG_DP1: 11.2 U$1.31 | length 19.1
  Top w0.15: v1(59.69,45.212) 59.868,45.034 U$1.31
  Bottom w0.15: 11.2 53.492,57.307 54.162,56.637 56.879,56.637 59.342,54.174 59.342,48.497 58.96,48.116 58.96,45.942 v1(59.69,45.212)
PPM-SBUS-PROT: JP1.1 U$1.62 | length 27.7
  Top w0.15: JP1.1@67.31,31.664 67.505,31.468 v1(67.505,30.886)
  Top w0.254: U$1.62 67.378,48.368 69.163,46.584 v1(69.163,46.387)
  Top w0.8: JP1.1@67.4,32.004 68,32.004
  Bottom w0.15: v1(67.505,30.886) 67.662,30.886 67.886,31.11 68.636,31.11 68.778,31.252 72.215,31.252 73.294,32.33 73.294,34.964 70.274,37.984 70.274,45.483 69.37,46.387 v1(69.163,46.387)
PRESSURE_SENS_IN: U$1.21
PROT_SPARE_1: U$1.8
PROT_SPARE_2: U$1.10
RX_5V0_OUT: "PSM ?.RX" JP2.1 | length 29.5
  Top w0.254: v1(60.912,32.387) 61.422,31.877 61.722,31.877 ; JP2.1@61.611,31.873 62.357,31.623 ; v1(65.413,53.886) 65.413,51.369 65.786,50.995 v1(65.786,50.8)
  Top w0.8: JP2.1@61.611,31.873 62.1,31.873
  Bottom w0.254: v1(60.912,32.387) 61.663,32.387 62.162,32.887 62.162,34.399 62.861,35.097 62.861,35.515 62.686,35.69 62.686,38.91 63.926,40.15 63.926,42.364 65.163,43.601 65.163,50.387 65.576,50.8 v1(65.786,50.8) ; 65.199,56.589 65.199,54.1 v1(65.413,53.886)
S.BUS_OUT: U$1.64
SAFETY: 7.6 U$1.17 | length 28.4
  Top w0.15: U$1.17 56.363,43.436 v1(56.413,43.386) ; v1(56.413,38.136) 61.663,38.136 61.885,38.359 71.94,38.359 72.162,38.136 v1(77.412,38.136)
  Bottom w0.15: v1(56.413,38.136) v1(56.413,43.386) ; 7.6 77.406,38.13 v1(77.412,38.136)
SERIAL1_CTS: 5.4 U$1.44 | length 13.9
  Top w0.15: U$1.44 62.878,55.852 65.135,58.11 v1(68.635,58.11)
  Bottom w0.15: v1(68.635,58.11) 69.205,58.679 5.4
SERIAL1_RTS: 5.5 U$1.42 | length 17.5
  Top w0.15: U$1.42 62.378,55.852 64.913,58.386 67.913,58.386 69.662,60.136 v1(70.413,60.136)
  Bottom w0.15: v1(70.413,60.136) 70.455,60.094 5.5
SERIAL1_RX: 5.3 U$1.38 | length 16.6
  Top w0.15: U$1.38 61.366,56.34 65.413,60.387 v1@67.913,60.387
  Bottom w0.15: 5.3 v1(67.945,60.354)
SERIAL1_TX: 5.2 U$1.40 | length 14.5
  Top w0.15: U$1.40 61.874,56.348 65.636,60.11 66.663,60.11 66.663,59.886 v1(66.7,59.849)
  Bottom w0.15: 5.2 v1(66.7,59.849)
SERIAL2_CTS: U$1.32
SERIAL2_RTS: U$1.30
SERIAL2_RX: U$1.34
SERIAL2_TX: U$1.36
SERIAL3_RX: 7.3 U$1.20 | length 32.1
  Top w0.15: U$1.20 56.871,48.678 v1(56.912,48.636) ; v1(56.912,39.886) 57.216,39.886 57.412,40.083 71.335,40.083 72.965,41.712 77.238,41.712 v1(77.411,41.885)
  Bottom w0.15: v1(56.912,39.886) v1(56.912,48.636) ; 7.3 v1(77.411,41.885)
SERIAL3_TX: 7.2 U$1.22 | length 29.2
  Top w0.15: U$1.22 57.412,49.505 v1(57.412,48.137) ; v1(57.412,40.886) 57.614,40.684 70.847,40.684 v1(73.004,42.841)
  Bottom w0.15: v1(57.412,40.886) v1(57.412,48.137) ; v1(73.004,42.841) 73.179,43.016 73.179,43.267 73.446,43.534 75.97,43.534 7.2
SERIAL4_RX: U$1.16
SERIAL4_TX: U$1.18
SERIAL5_RX: U$1.12
SERIAL5_TX: U$1.14
SPI_EXT_MISO: U$1.67
SPI_EXT_MOSI: U$1.51
SPI_EXT_SCK: U$1.73
V\B\U\S\_\V\A\L\I\D\: "PSM ?.!VBUS_VALID" U$1.59 | length 14.9
  Top w0.15: U$1.59 v1(66.878,45.352)
  Bottom w0.15: 63.195,33.589 63.615,33.589 63.968,33.942 64.224,33.942 64.488,34.207 64.488,39.462 64.635,39.609 64.635,42.069 65.926,43.36 65.926,43.608 66.191,43.873 66.412,43.873 66.412,44.886 v1(66.878,45.352)
V\D\D\_\5\V\_\H\I\P\O\W\E\R\_\O\C\: "PSM ?.!VDD_5V_HIPOWER_OC" U$1.45 | length 17.2
  Top w0.15: U$1.45 63.378,45.352 v1(63.662,45.637)
  Bottom w0.15: v1(63.662,45.637) 63.662,49.853 65.392,51.583 71.858,51.583 72.602,50.839 74.131,50.839
V\D\D\_\5\V\_\P\E\R\I\P\H\_\E\N\: "PSM ?.!VDD_5V_PERIPH_EN" U$1.27 | length 20
  Top w0.15: U$1.27 58.877,43.422 v1(58.913,43.386) ; v1(58.913,41.136) 59.028,41.021 59.412,41.021
  Top w0.152: 59.412,41.021 70.297,41.021 v1(72.412,43.136)
  Bottom w0.15: v1(58.913,41.136) v1(58.913,43.386)
  Bottom w0.254: v1(72.412,43.136) 72.436,43.136 74.131,44.831
V\D\D\_\5\V\_\P\E\R\I\P\H\_\O\C\: "PSM ?.!VDD_5V_PERIPH_OC" U$1.43 | length 19.5
  Top w0.15: v1@62.878,43.386 U$1.43
  Bottom w0.15: v1(62.913,43.386) 64.163,44.636 64.163,49.961 65.507,51.306 71.744,51.306 74.131,48.918 74.131,48.839
V\D\D\_\B\A\C\K\U\P\_\V\A\L\I\D\: "PSM ?.!VDD_BACKUP_VALID" U$1.57 | length 11.4
  Top w0.15: v1(66.378,43.421) U$1.57
  Bottom w0.15: 65.199,33.589 64.912,33.875 64.912,41.955 v1(66.378,43.421)
V\D\D\_\B\R\I\C\K\_\V\A\L\I\D\: "PSM ?.!VDD_BRICK_VALID" U$1.55 | length 11.5
  Top w0.15: U$1.55 65.878,43.171 66.413,42.637 v1(66.913,42.637)
  Bottom w0.15: v1(66.913,42.637) 66.913,33.875 67.198,33.589
VBUS: 11.1 "PSM ?.VBUS" "PSM ?.VDD_VBUS" U$1.29 | length 58.7
  Top w0.15: v1(53.162,40.387) 53.663,39.886 54.729,39.886 55.066,40.224 55.759,40.224 56.096,39.886 56.273,39.886 56.746,40.36 71.221,40.36 v1(73.025,42.164) ; v1(53.162,42.637) 53.216,42.69 55.541,42.69 55.818,42.967 56.192,42.967 56.225,42.934 56.6,42.934 56.633,42.967 58.692,42.967 58.725,42.934 59.1,42.934 59.365,43.199 59.365,44.242 U$1.29
  Top w0.8: v2(48.162,54.137) 50.912,56.887 v2(50.912,58.886)
  Bottom w0.15: v1(53.162,42.637) 54.131,42.637 ; 73.165,42.389 73.456,42.389 73.456,42.68 73.6,42.824 74.131,42.824
  Bottom w0.8: v2(48.162,54.137) 47.942,53.916 47.942,43.256 50.652,40.546 54.131,40.546 54.131,40.639 54.131,42.637 54.131,42.639 ; v2(50.912,58.886) 52.136,58.886 11.1
VDD_3V3_SPEKTRUM: "PSM ?.SPEK" JP2.3 | length 29.5
  Top w0.254: JP2.3@63.163,31.623 63.163,31.886 63.412,31.886 64.037,32.511 v1(64.037,34.394) ; v1(66.162,53.137) 66.29,53.009 66.29,50.931 v1(66.421,50.8)
  Bottom w0.254: 61.189,56.589 64.641,53.137 v1(66.162,53.137) ; v1(64.037,34.394) 64.037,39.511 64.307,39.78 64.307,42.206 65.597,43.497 65.597,49.821 66.421,50.645 v1(66.421,50.8)
VDD_3V3_SPEKTRUM_EN: "PSM ?.VDD_3V3_SPEKTRUM_EN" U$1.19 | length 21.3
  Top w0.15: U$1.19 56.871,44.854 58.903,46.887 v1(66.413,46.887)
  Bottom w0.15: v1(66.413,46.887) 66.913,46.887 69.163,49.137 72.162,49.137 72.412,48.887 72.412,47.637 73.21,46.839 74.131,46.839
VDD_5V_BACKUP: 1.14 "PSM ?.VDD_5V_BACKUP" D701.ANODE U$1.53 | length 32.2
  Top w0.15: v1(55.662,41.637) 56.129,42.103 56.944,42.103 56.977,42.136 58.348,42.136 58.381,42.103 59.444,42.103 59.477,42.136 60.962,42.136 61.051,42.047 63.823,42.047 65.378,43.602 U$1.53
  Top w0.8: v2(55.413,39.386) 55.635,39.164 55.635,36.664 v2(57.913,34.386)
  Bottom w0.8: 54.131,46.739 54.131,45.637 55.662,44.105 55.662,43.735 55.635,43.708 55.635,39.609 v2(55.413,39.386) ; 1.14 54.414,30.888 55.524,31.998 D701.ANODE 55.524,33.525 56.386,34.386 v2(57.913,34.386)
VDD_5V_BRICK: 9.1 9.2 "PSM ?.VDD_BRICK_IN" | length 9
  Bottom w0.8: 9.1 9.2 51.521,45.745 52.854,47.078 52.854,47.328 52.913,47.386 52.913,47.887 54.131,49.105 54.131,50.839
VDD_5V_HIPOWER: "PSM ?.5V_HIPOWER" L101.P$1 | length 7.9
  Bottom w0.15: L101.P$1 61.976,57.747 67.802,57.747 68.96,56.589 69.199,56.589
VDD_5V_IN_PROT: "PSM ?.VDD_5V_IN_PROT" U$1.61 U$1.63 | length 11.5
  Top w0.8: 67.663,44.386 67.663,43.636 67.724,43.575 67.724,42.004 v2(67.818,41.91)
  Bottom w0.8: v2(67.818,41.91) 67.889,41.91 67.913,41.886 67.913,36.637 69.199,35.351 69.199,33.589
VDD_SERVO_IN: "PSM ?.SERVO_IN" L701.P$2 U$1.9 | length 21.8
  Top w0.254: v1(51.912,35.886) 51.912,38.136 52.663,38.887 51.909,39.64 51.909,42.882 52.413,43.386 54.058,43.386 54.356,43.684 U$1.9
  Bottom w0.8: v1(51.912,35.886) 52.617,35.886 L701.P$2@52.663,35.841 ; L701.P$2 60.061,35.738 61.189,34.61 61.189,33.589
pads on no net: "PSM ?.NC" M3_MOUNT901.1 M3_MOUNT902.1 M3_MOUNT903.1 M3_MOUNT904.1 U$1.26 U$1.65 U$1.hole-1 U$1.hole-2

## Polygon pours and split planes (outlines as drawn)
GND on Bottom "GND" (solid, remove dead copper, shelved, pour order 5): 46.91,25.451 cw(c46.914,25.4)
GND on Bottom "Top-No Net1" (solid, remove dead copper, pour order 13): 42.901,28.905 ccw(c46.66,29.159) 46.914,25.4 cw(c46.914,25.4) 46.914,25.4 76.708,25.4 cw(c76.708,25.4) 76.708,25.4 ccw(c76.81,29.489) 80.899,29.388 cw(c80.899,29.388) 80.899,29.388 80.899,59.385 ccw(c76.797,59.296) 76.886,63.398 46.431,63.398 cw(c46.431,63.398) 46.431,63.399 46.902,63.399 ccw(c46.66,59.639) 42.901,59.893 cw(c42.901,59.893) 42.901,59.893
GND on Top "GND" (solid, remove dead copper, shelved, pour order 7): 46.91,25.451 cw(c46.914,25.4)
GND on Top "Top-No Net" (solid, remove dead copper, pour order 10): 42.901,28.905 ccw(c46.66,29.159) 46.914,25.4 cw(c46.914,25.4) 46.914,25.4 76.708,25.4 cw(c76.708,25.4) 76.708,25.4 ccw(c76.81,29.489) 80.899,29.388 cw(c80.899,29.388) 80.899,29.388 80.899,59.385 ccw(c76.797,59.296) 76.886,63.398 46.431,63.398 cw(c46.431,63.398) 46.431,63.399 46.902,63.399 ccw(c46.66,59.639) 42.901,59.893 cw(c42.901,59.893) 42.901,59.893

## Keep-outs
Keep-Out Layer:
  the board outline again, w0.1

## Other copper
Top:
  text "REV B" at 53.162,51.387 h1.52
Bottom:
  text "REV B" at 49.662,30.636 h1.52 r90

## Silkscreen, mask and mechanical layers (free items; w line width, h text height)
Top Overlay:
  lines w0.254: 42.912,42.637 49.412,42.637 49.412,54.864 43.18,54.864 ; 43.053,33.274 49.403,33.274 49.403,39.37 43.053,39.37 ; 50.8,63.246 50.8,54.864 59.944,54.864 59.944,63.246 ; 52.324,25.527 52.324,36.137 73.163,36.137 73.163,27.062 71.628,25.527 ; 61.162,32.637 62.162,32.637 ; 64.135,63.246 64.135,54.864 72.771,54.864 72.771,63.246 ; 65.413,33.136 66.663,32.136 ; 67.162,32.637 68.163,32.637 ; 69.723,32.004 70.912,33.136 ; 73.787,40.137 73.787,44.137 ; 73.787,40.259 73.787,34.417 80.899,34.417 ; 73.787,43.561 73.787,45.466 80.899,45.466 ; 80.772,49.53 73.787,49.53 73.787,55.372 80.772,55.372
  text "Buzz/USB" at 52.413,62.137 h1.57
  text "Telemetry" at 65.413,61.887 h1.57
  text "VUSB" at 52.578,55.626 h1.57 r90
  text "USB DP" at 53.721,55.626 h1.57 r90
  text "USB DM" at 54.991,55.626 h1.57 r90
  text "GND" at 56.261,55.626 h1.57 r90
  text "BUZZ" at 57.531,55.626 h1.57 r90
  text "LED" at 58.801,55.626 h1.57 r90
  text "5V" at 65.786,55.626 h1.57 r90
  text "TX 1" at 67.056,55.626 h1.57 r90
  text "RX 1" at 68.326,55.626 h1.57 r90
  text "CTS" at 69.596,55.626 h1.57 r90
  text "RTS" at 70.866,55.626 h1.57 r90
  text "GND" at 72.136,55.626 h1.57 r90
  text "5V" at 74.422,53.975 h1.57
  text "GND" at 44.45,53.467 h1.57
  text "CAN H2" at 74.422,52.705 h1.57
  text "GND" at 44.45,51.562 h1.57
  text "CAN L2" at 74.422,51.435 h1.57
  text "CAN 2" at 80.663,50.637 h1.57 r90
  text "GND" at 74.422,50.165 h1.57
  text "Volt" at 44.45,49.657 h1.57
  text "Current" at 44.45,47.371 h1.57
  text "FMU" at 58.547,46.101 h1.57
  text "POWER" at 44.162,45.886 h1.57 r90
  text "5V PM" at 44.45,45.212 h1.57
  text "5V GPS" at 74.422,43.942 h1.57
  text "5V PM" at 44.45,43.307 h1.57
  text "TX 3" at 74.422,42.672 h1.57
  text "RX 3" at 74.422,41.402 h1.57
  text "SCL 1" at 74.422,40.005 h1.57
  text "SDA 1" at 74.422,38.862 h1.57
  text "GPS" at 80.413,38.136 h1.57 r90
  text "GND" at 44.45,37.846 h1.57
  text "S BUTT" at 74.422,37.592 h1.57
  text "SDA 2" at 44.45,36.449 h1.57
  text "S LED" at 74.422,36.322 h1.57
  text "SCL 2" at 44.45,35.306 h1.57
  text "I2C" at 43.913,35.137 h1.57 r90
  text "GND" at 74.422,35.052 h1.57
  text "SERVOS and RX" at 57.412,34.636 h1.57
  text "5V" at 44.45,34.036 h1.57
  text "PPM/S.B" at 63.913,33.386 h1
  text "SPKT" at 69.662,33.386 h1
  text "3V3" at 63.729,32.57 h1 r270
  text "5V" at 60.662,31.263 h1 r90
  text "GND" at 53.761,25.654 h1.57 r90
  text "VCC SERVO" at 55.011,25.654 h1.57 r90
  text "IO-CH1" at 56.261,25.654 h1.57 r90
  text "IO-CH2" at 57.511,25.654 h1.57 r90
  text "IO-CH3" at 58.761,25.654 h1.57 r90
  text "IO-CH4" at 60.021,25.654 h1.57 r90
  text "IO-CH5" at 61.266,25.654 h1.57 r90
  text "IO-CH6" at 62.536,25.654 h1.57 r90
  text "IO-CH7" at 63.761,25.654 h1.57 r90
  text "IO-CH8" at 65.011,25.654 h1.57 r90
  text "FM-CH1" at 66.261,25.654 h1.57 r90
  text "FM-CH2" at 67.521,25.654 h1.57 r90
  text "PPM IN" at 68.766,25.654 h1.57 r90
  text "VCC RX" at 70.036,25.654 h1.57 r90
  text "GND" at 71.28,25.654 h1.57 r90
Bottom Overlay:
  text "IO UART 1" at 61.61,33.866 h1.57
Top Solder:
  lines w0.8: 61.413,31.886 62.162,31.886 ; 67.412,32 68.163,32
Dimension:
  lines w0.1: 42.65,31.4 ccw(c48.9,31.4) 48.9,25.15 74.9,25.15 ccw(c74.9,31.4) 81.15,31.4 81.15,57.4 ccw(c74.9,57.4) 74.9,63.65 48.9,63.65 ccw(c48.9,57.4) 42.65,57.4 42.65,31.4 ; 76.708,25.4 ccw(c76.708,25.4) 76.708,25.4
tDocu:
  lines w0.025: 132.033,26.354 134.254,28.575 137.302,31.623 140.35,34.671 143.398,37.719 146.446,40.767 ; 132.033,27.878 132.73,28.575 135.778,31.623 138.826,34.671 141.874,37.719 144.922,40.767 146.446,42.291 ; 132.033,29.402 134.254,31.623 137.302,34.671 140.35,37.719 143.398,40.767 146.446,43.815 ; 132.033,30.926 132.73,31.623 135.778,34.671 138.826,37.719 141.874,40.767 144.922,43.815 146.446,45.339 ; 132.033,32.45 134.254,34.671 137.302,37.719 140.35,40.767 143.398,43.815 146.446,46.863 ; 132.033,33.974 132.73,34.671 135.778,37.719 138.826,40.767 141.874,43.815 144.922,46.863 ; 132.033,35.498 134.254,37.719 137.302,40.767 140.35,43.815 143.398,46.863 ; 132.033,37.022 132.73,37.719 135.778,40.767 138.826,43.815 141.874,46.863 ; 132.033,38.546 134.254,40.767 137.302,43.815 140.35,46.863 ; 132.033,40.07 132.73,40.767 135.778,43.815 138.826,46.863 ; 132.033,41.594 134.254,43.815 137.302,46.863 ; 132.033,43.118 132.73,43.815 135.778,46.863 ; 132.033,44.642 134.254,46.863 ; 132.033,46.166 132.73,46.863 ; 132.73,25.527 135.778,28.575 138.826,31.623 141.874,34.671 144.922,37.719 146.446,39.243 ; 134.254,25.527 137.302,28.575 140.35,31.623 143.398,34.671 146.446,37.719 ; 135.778,25.527 138.826,28.575 141.874,31.623 144.922,34.671 146.446,36.195 ; 137.302,25.527 140.35,28.575 143.398,31.623 146.446,34.671 ; 138.826,25.527 141.874,28.575 144.922,31.623 146.446,33.147 ; 140.35,25.527 143.398,28.575 146.446,31.623 ; 141.874,25.527 144.922,28.575 146.446,30.099 ; 143.398,25.527 146.446,28.575 ; 144.922,25.527 146.446,27.051
  lines w0.381: 83.439,28.575 90.071,28.575 102.657,28.575 113.995,28.575 123.353,28.575 132.033,28.575 146.446,28.575 ; 83.439,31.623 90.071,31.623 102.657,31.623 113.995,31.623 123.353,31.623 132.033,31.623 146.446,31.623 ; 83.439,34.671 90.071,34.671 102.657,34.671 113.995,34.671 123.353,34.671 132.033,34.671 146.446,34.671 ; 83.439,37.719 90.071,37.719 102.657,37.719 113.995,37.719 123.353,37.719 132.033,37.719 146.446,37.719 ; 83.439,40.767 90.071,40.767 102.657,40.767 113.995,40.767 123.353,40.767 132.033,40.767 146.446,40.767 ; 83.439,43.815 90.071,43.815 102.657,43.815 113.995,43.815 123.353,43.815 132.033,43.815 146.446,43.815 ; 83.439,46.863 146.446,46.863 ; 90.071,49.911 90.071,25.527 ; 102.657,49.911 102.657,25.527 ; 113.995,49.911 113.995,25.527 ; 123.353,49.911 123.353,25.527 ; 132.033,49.911 132.033,25.527 ; 90.071,25.527 83.439,25.527 83.439,49.911 146.446,49.911 146.446,25.527 132.033,25.527 ; 90.071,25.527 102.657,25.527 ; 102.657,25.527 113.995,25.527 ; 113.995,25.527 123.353,25.527 ; 123.353,25.527 132.033,25.527
  text "Layer" at 84.963,47.625 h1.52
  text "Name" at 91.595,47.625 h1.52
  text "Material" at 104.181,47.625 h1.52
  text "Thickness" at 115.519,47.625 h1.52
  text "Constant" at 124.877,47.625 h1.52
  text "Board Layer Stack" at 133.557,47.625 h1.52
  text "1" at 84.963,44.577 h1.52
  text "Top Overlay" at 91.595,44.577 h1.52
  text "2" at 84.963,41.529 h1.52
  text "Top Solder" at 91.595,41.529 h1.52
  text "Solder Resist" at 104.181,41.529 h1.52
  text "0.010mm" at 115.519,41.529 h1.52
  text "3.5" at 124.877,41.529 h1.52
  text "3" at 84.963,38.481 h1.52
  text "Top" at 91.595,38.481 h1.52
  text "Copper" at 104.181,38.481 h1.52
  text "0.035mm" at 115.519,38.481 h1.52
  text "4" at 84.963,35.433 h1.52
  text "Dielectric 1" at 91.595,35.433 h1.52
  text "FR-4" at 104.181,35.433 h1.52
  text "1.500mm" at 115.519,35.433 h1.52
  text "4.8" at 124.877,35.433 h1.52
  text "5" at 84.963,32.385 h1.52
  text "Bottom" at 91.595,32.385 h1.52
  text "Copper" at 104.181,32.385 h1.52
  text "0.035mm" at 115.519,32.385 h1.52
  text "6" at 84.963,29.337 h1.52
  text "Bottom Solder" at 91.595,29.337 h1.52
  text "Solder Resist" at 104.181,29.337 h1.52
  text "0.010mm" at 115.519,29.337 h1.52
  text "3.5" at 124.877,29.337 h1.52
  text "7" at 84.963,26.289 h1.52
  text "Bottom Overlay" at 91.595,26.289 h1.52

## Text inside footprints (layer, text, board x,y; h text height)
"PSM ?": Bottom Overlay "IO and power PixHawk2" at 67.691,47.959 h0.94 r45; Bottom Overlay "POWER IN" at 57.531,46.229 h0.94 r90; Bottom Overlay "ALM" at 75.481,41.339 h0.63 r90; Bottom Overlay "VBUS" at 75.481,43.539 h0.63 r90; Bottom Overlay "P EN" at 75.481,45.339 h0.63 r90; Bottom Overlay "S EN" at 75.481,47.339 h0.63 r90; Bottom Overlay "P OC" at 75.481,49.339 h0.63 r90; Bottom Overlay "HP OC" at 75.481,51.939 h0.63 r90; Bottom Overlay "BUZZ" at 75.481,39.439 h0.63 r90; Bottom Overlay "GND" at 71.781,57.439 h0.63; Bottom Overlay "FMU_5V" at 70.181,32.339 h0.63; Bottom Overlay "A_OK" at 67.881,32.339 h0.63; Bottom Overlay "B_OK" at 65.881,32.339 h0.63; Bottom Overlay "U_OK" at 63.881,32.339 h0.63; Bottom Overlay "Servo_VIN" at 60.481,32.939 h0.63; Bottom Overlay "GND" at 71.781,32.339 h0.63; Bottom Overlay "5V HP" at 69.981,57.539 h0.63; Bottom Overlay "5v P" at 67.781,57.539 h0.63; Bottom Overlay "NC" at 63.481,57.532 h0.63; Bottom Overlay "5V RX" at 65.881,57.539 h0.63; Bottom Overlay "3v3 SPEK" at 60.481,56.839 h0.63; Bottom Overlay "IN_5V_USB" at 53.081,42.939 h0.63 r90; Bottom Overlay "IN_5V_B" at 53.081,46.839 h0.63 r90; Bottom Overlay "IN_5V_A" at 53.081,50.739 h0.63 r90; Bottom Overlay "3DR Part# PCA_0007" at 68.491,47.159 h0.94 r45
U$1: Top Overlay "Male" at 66.188,47.934 h1.97 r180